# EAGLE board OutputIndicator_v1p3 (EAGLE 9.6.1), part 1 of 2
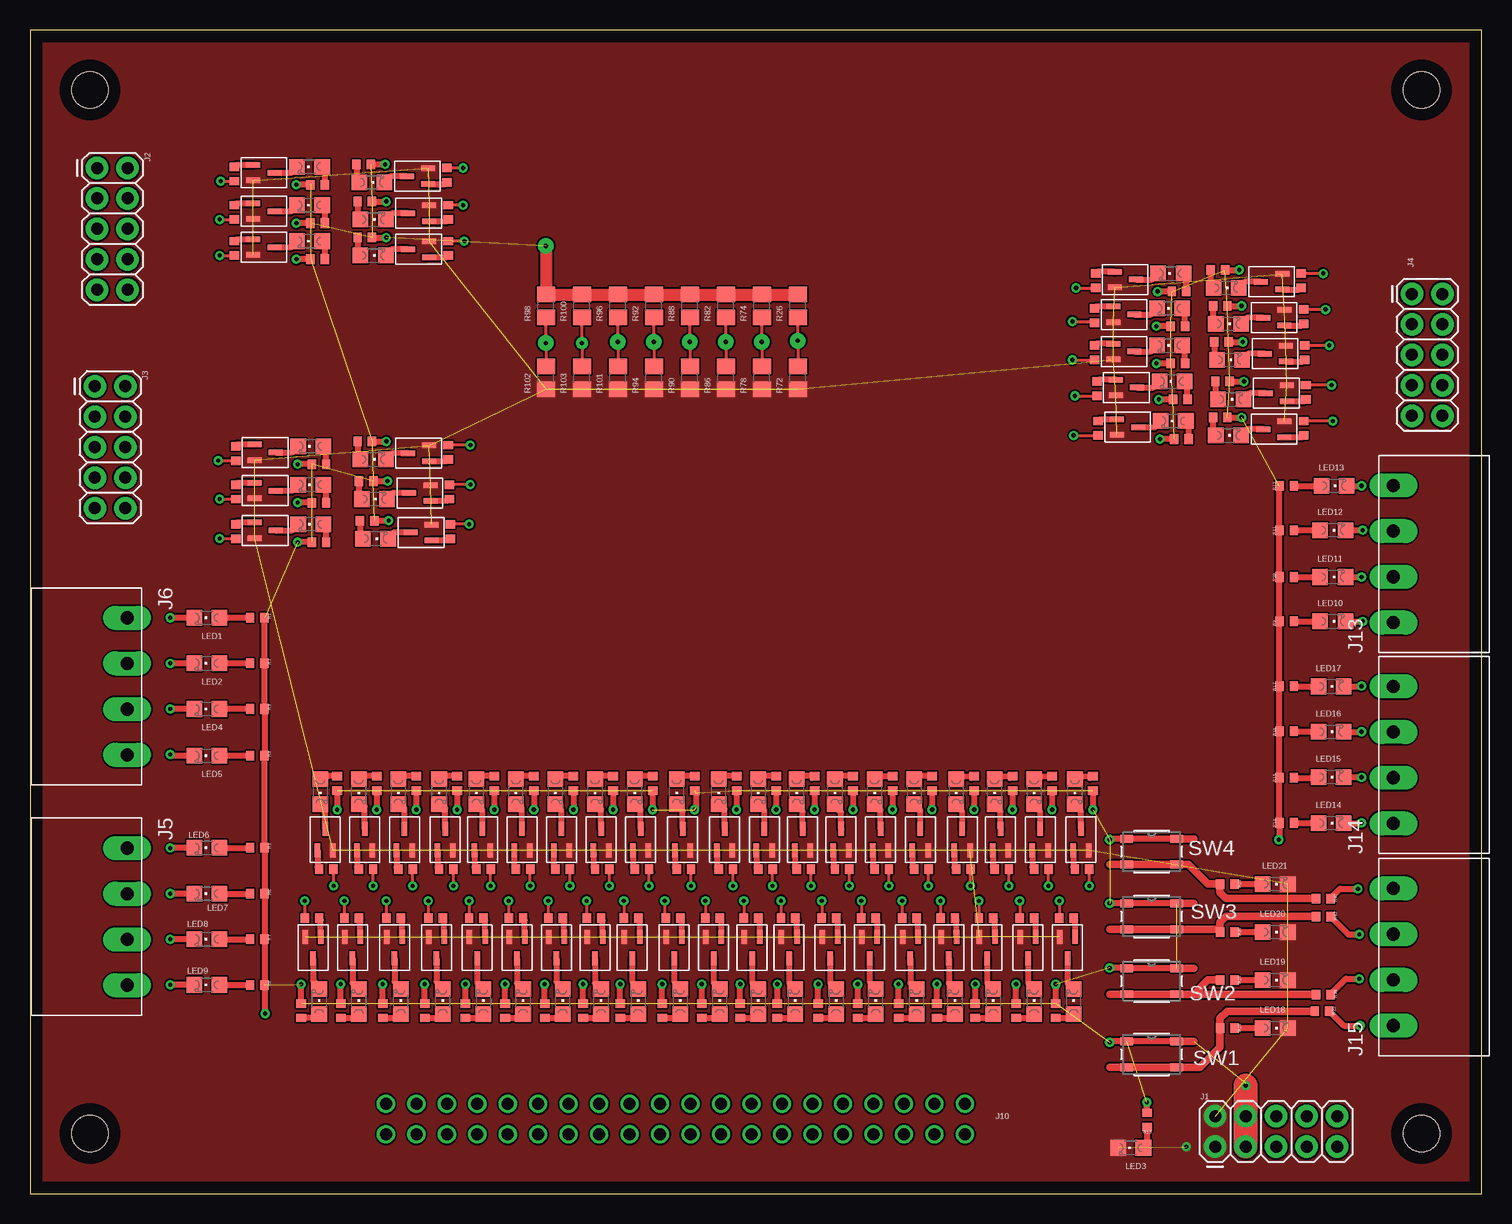
[diagram p0: board, top side]
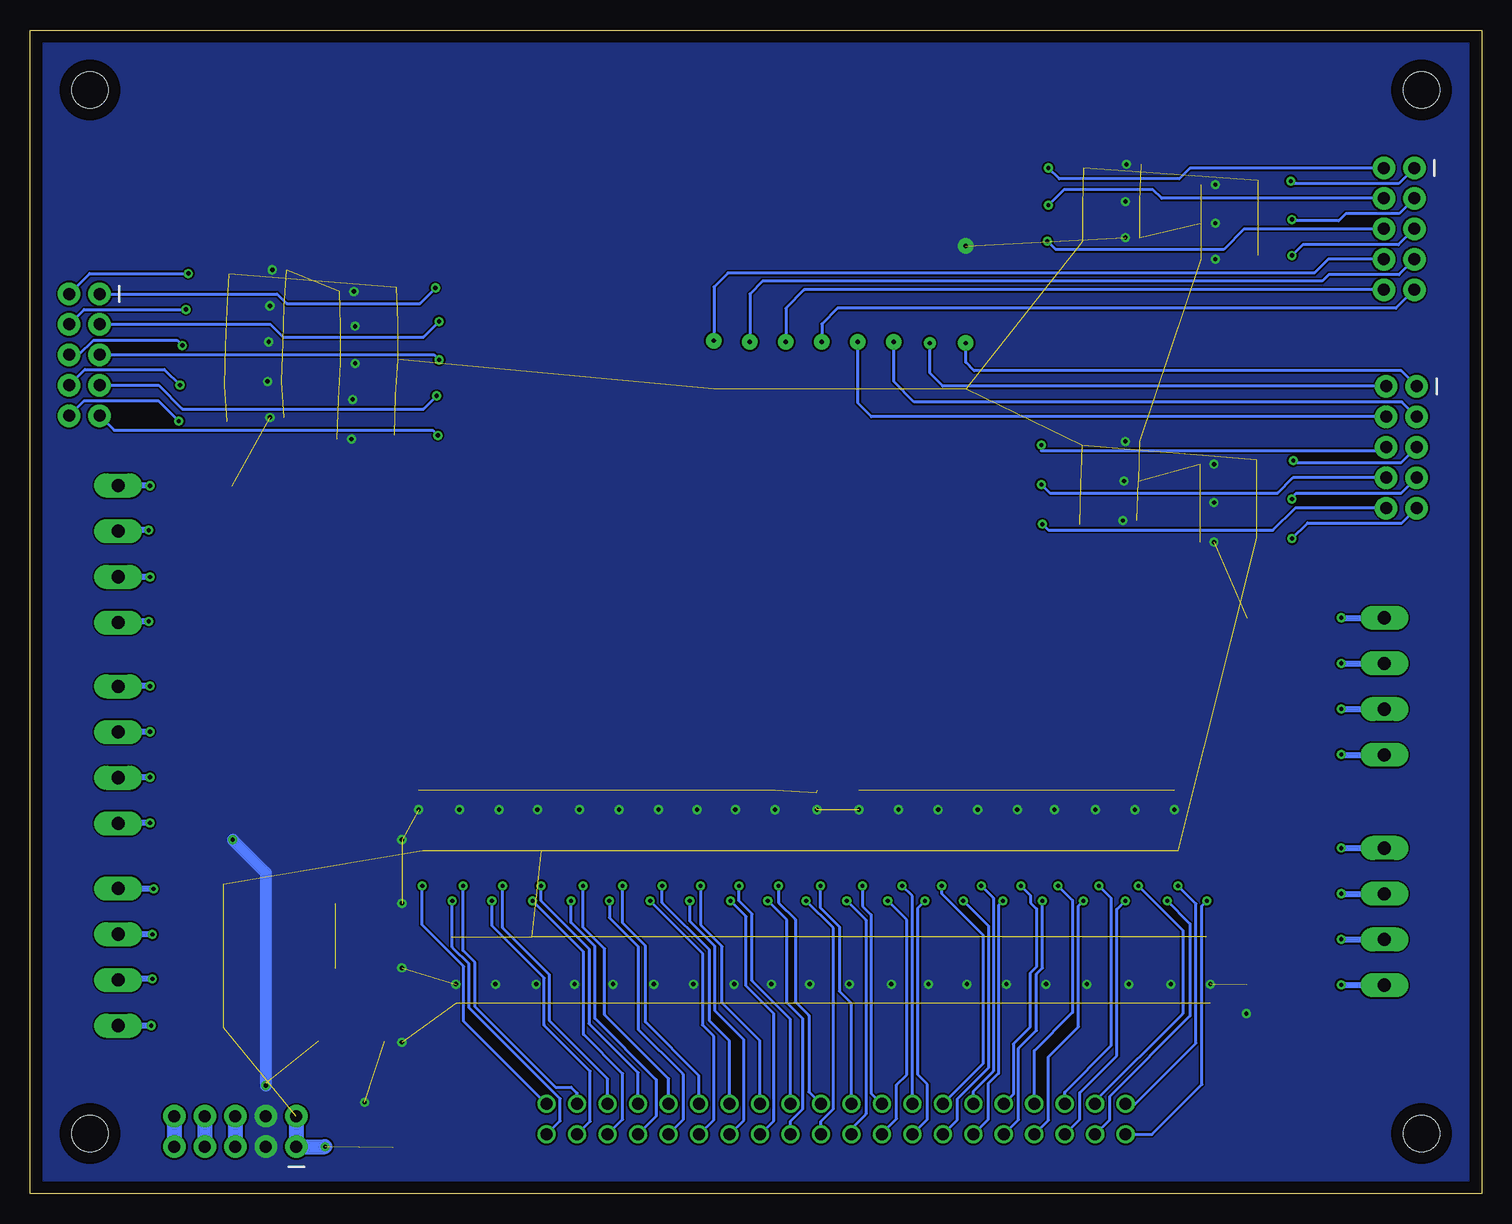
[diagram p1: board, bottom side, seen from below]

Size 121 x 97 mm. Coordinates in mm from the lower left corner, seen from the top.
Outline: 0,0 121,0 121,97 0,97 0,0
Copper layers (1*16): Top 0.035mm / dielectric 1.5mm / Bottom 0.035mm
Design rules "default": minimum track width 6mil, minimum drill 0.35mm, track to track 6mil, track to pad 6mil, pad to pad 6mil, via to via 6mil, smd to smd 6mil, copper to edge 40mil, drill to drill 6mil, minimum pad ring 10mil, minimum via ring 8mil, stop-mask expansion 4mil, vias tented up to drill 0mil, thermal gap 10mil
Holes 3 mm at 5,5 116,5 5,92 116,92

## Footprints (pad centres in the part's own frame; a part is rotated, then mirrored left to right if it is on the bottom)
2X5 = drill 1 pad 1.88: 1 0,0; 2 0,2.54; 3 2.54,0; 4 2.54,2.54; 5 5.08,0; 6 5.08,2.54; 7 7.62,0; 8 7.62,2.54; 9 10.16,0; 10 10.16,2.54
1X4_3.81MM_PITCH = drill 1.1 pad 2 long: P$1 0,0; P$2 3.81,0; P$3 7.62,0; P$4 11.43,0
HEADER_2_X_20_.1_INCH = drill 1: P$1 -24.13,-1.27; P$2 -24.13,1.27; P$3 -21.59,-1.27; P$4 -21.59,1.27; P$5 -19.05,-1.27; P$6 -19.05,1.27; P$7 -16.51,-1.27; P$8 -16.51,1.27; P$9 -13.97,-1.27; P$10 -13.97,1.27; P$11 -11.43,-1.27; P$12 -11.43,1.27; P$13 -8.89,-1.27; P$14 -8.89,1.27; P$15 -6.35,-1.27; P$16 -6.35,1.27; P$17 -3.81,-1.27; P$18 -3.81,1.27; P$19 -1.27,-1.27; P$20 -1.27,1.27; P$21 1.27,-1.27; P$22 1.27,1.27; P$23 3.81,-1.27; P$24 3.81,1.27; P$25 6.35,-1.27; P$26 6.35,1.27; P$27 8.89,-1.27; P$28 8.89,1.27; P$29 11.43,-1.27; P$30 11.43,1.27; P$31 13.97,-1.27; P$32 13.97,1.27; P$33 16.51,-1.27; P$34 16.51,1.27; P$35 19.05,-1.27; P$36 19.05,1.27; P$37 21.59,-1.27; P$38 21.59,1.27; P$39 24.13,-1.27; P$40 24.13,1.27
LED_0805_GREEN = smd 1.3 x 1.3: A 0,-1.05; C 0,1.05
0402 = smd 0.8 x 0.7: P$1 0,0.6; P$2 0,-0.6
0805 = smd 1.3 x 1.5: 1 -0.95,0; 2 0.95,0
PTS810 = smd 1.041 x 0.66: 1 -2.075,1.075; 2 2.075,1.075; 3 -2.075,-1.075; 4 2.075,-1.075
SOT323 = smd 0.457 x 1.168: 1 -0.65,-0.876; 2 0.65,-0.876; 3 0,0.876

## Placement (x,y rotation side)
J1  [2X5]  98.8,3.9 0 top
J2  [2X5]  5.6,85.5 270 top
J3  [2X5]  5.4,67.3 270 top
J4  [2X5]  115.2,75 270 top
J5  [1X4_3.81MM_PITCH]  8.1,28.8 270 top
J6  [1X4_3.81MM_PITCH]  8.1,48 270 top
J10  [HEADER_2_X_20_.1_INCH]  53.8,6.2 0 top
J13  [1X4_3.81MM_PITCH]  113.65,47.6 90 top
J14  [1X4_3.81MM_PITCH]  113.65,30.85 90 top
J15  [1X4_3.81MM_PITCH]  113.65,14 90 top
LED1  LED_0805_GREEN  [LED_0805_GREEN]  14.75,48 90 top
LED2  LED_0805_GREEN  [LED_0805_GREEN]  14.75,44.2 90 top
LED3  LED_0805_GREEN  [LED_0805_GREEN]  91.76,3.81 90 top
LED4  LED_0805_GREEN  [LED_0805_GREEN]  14.75,40.4 90 top
LED5  LED_0805_GREEN  [LED_0805_GREEN]  14.75,36.5 90 top
LED6  LED_0805_GREEN  [LED_0805_GREEN]  14.75,28.82 90 top
LED7  LED_0805_GREEN  [LED_0805_GREEN]  14.75,25 90 top
LED8  LED_0805_GREEN  [LED_0805_GREEN]  14.75,21.2 90 top
LED9  LED_0805_GREEN  [LED_0805_GREEN]  14.75,17.4 90 top
LED10  LED_0805_GREEN  [LED_0805_GREEN]  108.6,47.7 270 top
LED11  LED_0805_GREEN  [LED_0805_GREEN]  108.6,51.4 270 top
LED12  LED_0805_GREEN  [LED_0805_GREEN]  108.6,55.3 270 top
LED13  LED_0805_GREEN  [LED_0805_GREEN]  108.7,59 270 top
LED14  LED_0805_GREEN  [LED_0805_GREEN]  108.45,30.87 270 top
LED15  LED_0805_GREEN  [LED_0805_GREEN]  108.45,34.72 270 top
LED16  LED_0805_GREEN  [LED_0805_GREEN]  108.45,38.49 270 top
LED17  LED_0805_GREEN  [LED_0805_GREEN]  108.45,42.27 270 top
LED18  LED_0805_GREEN  [LED_0805_GREEN]  103.8,13.8 270 top
LED19  LED_0805_GREEN  [LED_0805_GREEN]  103.8,17.8 270 top
LED20  LED_0805_GREEN  [LED_0805_GREEN]  103.8,21.8 270 top
LED21  LED_0805_GREEN  [LED_0805_GREEN]  103.8,25.8 270 top
LED23  LED_0805_GREEN  [LED_0805_GREEN]  24.2,33.5 180 top
LED24  LED_0805_GREEN  [LED_0805_GREEN]  27.4,33.5 180 top
LED25  LED_0805_GREEN  [LED_0805_GREEN]  30.7,33.5 180 top
LED26  LED_0805_GREEN  [LED_0805_GREEN]  99.9,63.2 270 top
LED27  LED_0805_GREEN  [LED_0805_GREEN]  34.1,33.5 180 top
LED28  LED_0805_GREEN  [LED_0805_GREEN]  100.1,66.2 270 top
LED29  LED_0805_GREEN  [LED_0805_GREEN]  37.2,33.5 180 top
LED30  LED_0805_GREEN  [LED_0805_GREEN]  95.2,67.7 90 top
LED31  LED_0805_GREEN  [LED_0805_GREEN]  40.5,33.5 180 top
LED32  LED_0805_GREEN  [LED_0805_GREEN]  23.4,62.3 90 top
LED33  LED_0805_GREEN  [LED_0805_GREEN]  43.8,33.5 180 top
LED34  LED_0805_GREEN  [LED_0805_GREEN]  95.3,64.4 90 top
LED35  LED_0805_GREEN  [LED_0805_GREEN]  47.1,33.5 180 top
LED36  LED_0805_GREEN  [LED_0805_GREEN]  23.4,55.8 90 top
LED37  LED_0805_GREEN  [LED_0805_GREEN]  50.4,33.5 180 top
LED38  LED_0805_GREEN  [LED_0805_GREEN]  100,69.5 270 top
LED39  LED_0805_GREEN  [LED_0805_GREEN]  53.9,33.5 180 top
LED40  LED_0805_GREEN  [LED_0805_GREEN]  23.4,59.1 90 top
LED41  LED_0805_GREEN  [LED_0805_GREEN]  57.4,33.5 180 top
LED42  LED_0805_GREEN  [LED_0805_GREEN]  95,70.7 90 top
LED43  LED_0805_GREEN  [LED_0805_GREEN]  60.7,33.5 180 top
LED44  LED_0805_GREEN  [LED_0805_GREEN]  28.6,61.2 270 top
LED45  LED_0805_GREEN  [LED_0805_GREEN]  63.9,33.5 180 top
LED46  LED_0805_GREEN  [LED_0805_GREEN]  99.9,72.5 270 top
LED47  LED_0805_GREEN  [LED_0805_GREEN]  67.1,33.5 180 top
LED48  LED_0805_GREEN  [LED_0805_GREEN]  28.7,57.9 270 top
LED49  LED_0805_GREEN  [LED_0805_GREEN]  70.4,33.5 180 top
LED50  LED_0805_GREEN  [LED_0805_GREEN]  95,73.8 90 top
LED51  LED_0805_GREEN  [LED_0805_GREEN]  73.7,33.5 180 top
LED52  LED_0805_GREEN  [LED_0805_GREEN]  28.8,54.6 270 top
LED53  LED_0805_GREEN  [LED_0805_GREEN]  77.2,33.5 180 top
LED54  LED_0805_GREEN  [LED_0805_GREEN]  99.7,75.5 270 top
LED55  LED_0805_GREEN  [LED_0805_GREEN]  80.4,33.5 180 top
LED56  LED_0805_GREEN  [LED_0805_GREEN]  23.3,85.6 90 top
LED57  LED_0805_GREEN  [LED_0805_GREEN]  83.7,33.5 180 top
LED58  LED_0805_GREEN  [LED_0805_GREEN]  95.1,76.7 90 top
LED59  LED_0805_GREEN  [LED_0805_GREEN]  87.1,33.5 180 top
LED60  LED_0805_GREEN  [LED_0805_GREEN]  23.3,82.4 90 top
LED61  LED_0805_GREEN  [LED_0805_GREEN]  24.1,16 0 top
LED63  LED_0805_GREEN  [LED_0805_GREEN]  27.4,16 0 top
LED64  LED_0805_GREEN  [LED_0805_GREEN]  23.3,79.4 90 top
LED65  LED_0805_GREEN  [LED_0805_GREEN]  30.9,16 0 top
LED67  LED_0805_GREEN  [LED_0805_GREEN]  34.4,16 0 top
LED69  LED_0805_GREEN  [LED_0805_GREEN]  37.8,16 0 top
LED71  LED_0805_GREEN  [LED_0805_GREEN]  41.1,16 0 top
LED73  LED_0805_GREEN  [LED_0805_GREEN]  44.4,16 0 top
LED75  LED_0805_GREEN  [LED_0805_GREEN]  47.6,16 0 top
LED76  LED_0805_GREEN  [LED_0805_GREEN]  28.5,84.3 270 top
LED77  LED_0805_GREEN  [LED_0805_GREEN]  50.7,16 0 top
LED79  LED_0805_GREEN  [LED_0805_GREEN]  54.2,16 0 top
LED80  LED_0805_GREEN  [LED_0805_GREEN]  28.6,81.2 270 top
LED81  LED_0805_GREEN  [LED_0805_GREEN]  57.5,16 0 top
LED83  LED_0805_GREEN  [LED_0805_GREEN]  60.7,16 0 top
LED84  LED_0805_GREEN  [LED_0805_GREEN]  28.6,78.2 270 top
LED85  LED_0805_GREEN  [LED_0805_GREEN]  63.8,16 0 top
LED87  LED_0805_GREEN  [LED_0805_GREEN]  67.2,16 0 top
LED89  LED_0805_GREEN  [LED_0805_GREEN]  70.5,16 0 top
LED91  LED_0805_GREEN  [LED_0805_GREEN]  73.9,16 0 top
LED93  LED_0805_GREEN  [LED_0805_GREEN]  77.1,16 0 top
LED95  LED_0805_GREEN  [LED_0805_GREEN]  80.3,16 0 top
LED97  LED_0805_GREEN  [LED_0805_GREEN]  83.7,16 0 top
LED99  LED_0805_GREEN  [LED_0805_GREEN]  87,16 0 top
R1  470R  [0402]  18.95,48 270 top
R2  470R  [0402]  18.95,44.2 270 top
R3  470R  [0402]  18.95,40.4 270 top
R4  470R  [0402]  18.95,36.5 270 top
R5  470R  [0402]  18.95,28.83 270 top
R6  470R  [0402]  18.95,25 270 top
R7  470R  [0402]  18.95,21.2 270 top
R8  470R  [0402]  18.95,17.38 270 top
R9  470R  [0402]  104.75,47.7 90 top
R10  470R  [0402]  104.75,51.4 90 top
R11  470R  [0402]  104.75,55.3 90 top
R12  470R  [0402]  104.75,59 90 top
R13  470R  [0402]  93.12,6.13 180 top
R14  470R  [0402]  104.75,30.9 90 top
R15  470R  [0402]  104.75,34.66 90 top
R16  470R  [0402]  104.75,38.53 90 top
R17  470R  [0402]  104.75,42.28 90 top
R18  470R  [0402]  99.8,13.8 270 top
R19  470R  [0402]  99.8,17.8 270 top
R20  470R  [0402]  99.8,21.8 270 top
R21  470R  [0402]  99.8,25.8 270 top
R22  470  [0402]  107.7,15.2 270 top
R23  470R  [0402]  25.6,34.2 0 top
R24  470R  [0402]  28.9,34.2 0 top
R25  470R  [0402]  32.2,34.2 0 top
R26  10k  [0805]  64,74 90 top
R27  470R  [0402]  35.6,34.2 0 top
R28  470R  [0402]  99.21,64.7 90 top
R29  470R  [0402]  38.7,34.2 0 top
R30  470R  [0402]  99.41,67.7 90 top
R31  470R  [0402]  42,34.2 0 top
R32  470R  [0402]  24.09,60.8 270 top
R33  470R  [0402]  45.3,34.2 0 top
R34  470  [0402]  107.8,16.6 270 top
R35  470R  [0402]  48.6,34.2 0 top
R36  470R  [0402]  24.09,54.3 270 top
R37  470R  [0402]  51.9,34.2 0 top
R38  470R  [0402]  95.89,66.2 270 top
R39  470R  [0402]  55.4,34.2 0 top
R40  470R  [0402]  24.09,57.6 270 top
R41  470R  [0402]  58.9,34.2 0 top
R42  470  [0402]  107.8,23.1 270 top
R43  470R  [0402]  62.2,34.2 0 top
R44  470R  [0402]  27.91,62.7 90 top
R45  470R  [0402]  65.4,34.2 0 top
R46  470  [0402]  107.8,24.6 270 top
R47  470R  [0402]  68.6,34.2 0 top
R48  470R  [0402]  28.01,59.4 90 top
R49  470R  [0402]  71.9,34.19 0 top
R50  470R  [0402]  95.99,62.9 270 top
R51  470R  [0402]  75.2,34.2 0 top
R52  470R  [0402]  28.11,56.1 90 top
R53  470R  [0402]  78.7,34.2 0 top
R54  470R  [0402]  99.31,71 90 top
R55  470R  [0402]  81.9,34.2 0 top
R56  470R  [0402]  23.99,84.1 270 top
R57  470R  [0402]  85.2,34.2 0 top
R58  470R  [0402]  95.69,69.2 270 top
R59  470R  [0402]  88.6,34.2 0 top
R60  470R  [0402]  23.99,80.9 270 top
R61  470R  [0402]  22.6,15.25 180 top
R62  470R  [0402]  99.21,74 90 top
R63  470R  [0402]  25.9,15.25 180 top
R64  470R  [0402]  23.99,77.9 270 top
R65  470R  [0402]  29.4,15.25 180 top
R66  470R  [0402]  95.69,72.3 270 top
R67  470R  [0402]  32.9,15.25 180 top
R68  470R  [0402]  99.01,77 90 top
R69  470R  [0402]  36.3,15.25 180 top
R70  470R  [0402]  95.79,75.2 270 top
R71  470R  [0402]  39.6,15.25 180 top
R72  4.99k  [0805]  64,68 90 top
R73  470R  [0402]  42.9,15.25 180 top
R74  10k  [0805]  61,74 90 top
R75  470R  [0402]  46.1,15.25 180 top
R76  470R  [0402]  27.81,85.8 90 top
R77  470R  [0402]  49.2,15.25 180 top
R78  4.99k  [0805]  61,68 90 top
R79  470R  [0402]  52.7,15.25 180 top
R80  470R  [0402]  27.91,82.7 90 top
R81  470R  [0402]  56,15.25 180 top
R82  10k  [0805]  58,74 90 top
R83  470R  [0402]  59.2,15.25 180 top
R84  470R  [0402]  27.91,79.7 90 top
R85  470R  [0402]  62.3,15.25 180 top
R86  4.99k  [0805]  58,68 90 top
R87  470R  [0402]  65.7,15.25 180 top
R88  10k  [0805]  55,74 90 top
R89  470R  [0402]  69,15.25 180 top
R90  4.99k  [0805]  55,68 90 top
R91  470R  [0402]  72.4,15.25 180 top
R92  10k  [0805]  52,74 90 top
R93  470R  [0402]  75.6,15.25 180 top
R94  4.99k  [0805]  52,68 90 top
R95  470R  [0402]  78.8,15.25 180 top
R96  10k  [0805]  49,74 90 top
R97  470R  [0402]  82.2,15.25 180 top
R98  10k  [0805]  43,74 90 top
R99  470R  [0402]  85.5,15.25 180 top
R100  10k  [0805]  46,74 90 top
R101  4.99k  [0805]  49,68 90 top
R102  4.99k  [0805]  43,68 90 top
R103  4.99k  [0805]  46,68 90 top
RYS1  1K  [0402]  24.7,27.05 270 top
RYS2  1K  [0402]  28,27.05 270 top
RYS3  1K  [0402]  31.3,27.05 270 top
RYS4  1K  [0402]  106.15,63.8 0 top
RYS5  1K  [0402]  34.7,27.05 270 top
RYS6  1K  [0402]  106.35,66.8 0 top
RYS7  1K  [0402]  37.8,27.05 270 top
RYS9  1K  [0402]  88.95,67.1 180 top
RYS10  1K  [0402]  41.1,27.05 270 top
RYS11  1K  [0402]  17.15,61.7 180 top
RYS12  1K  [0402]  44.4,27.05 270 top
RYS13  1K  [0402]  89.05,63.8 180 top
RYS14  1K  [0402]  47.7,27.05 270 top
RYS15  1K  [0402]  17.15,55.2 180 top
RYS16  1K  [0402]  51,27.05 270 top
RYS17  1K  [0402]  106.25,70.1 0 top
RYS18  1K  [0402]  54.5,27.05 270 top
RYS19  1K  [0402]  17.15,58.5 180 top
RYS20  1K  [0402]  58,27.05 270 top
RYS21  1K  [0402]  88.75,70.1 180 top
RYS22  1K  [0402]  61.3,27.05 270 top
RYS23  1K  [0402]  34.85,61.8 0 top
RYS24  1K  [0402]  64.5,27.05 270 top
RYS25  1K  [0402]  106.15,73.1 0 top
RYS26  1K  [0402]  67.7,27.05 270 top
RYS27  1K  [0402]  34.95,58.5 0 top
RYS28  1K  [0402]  71,27.05 270 top
RYS29  1K  [0402]  88.75,73.2 180 top
RYS30  1K  [0402]  74.3,27.05 270 top
RYS31  1K  [0402]  35.05,55.2 0 top
RYS32  1K  [0402]  77.8,27.05 270 top
RYS33  1K  [0402]  105.95,76.1 0 top
RYS34  1K  [0402]  81,27.05 270 top
RYS35  1K  [0402]  17.05,85 180 top
RYS36  1K  [0402]  84.3,27.05 270 top
RYS37  1K  [0402]  88.85,76.1 180 top
RYS38  1K  [0402]  87.7,27.05 270 top
RYS39  1K  [0402]  17.05,81.8 180 top
RYS40  1K  [0402]  23.5,22.95 90 top
RYS42  1K  [0402]  26.8,22.95 90 top
RYS43  1K  [0402]  17.05,78.8 180 top
RYS44  1K  [0402]  30.3,22.95 90 top
RYS46  1K  [0402]  33.8,22.95 90 top
RYS48  1K  [0402]  37.2,22.95 90 top
RYS50  1K  [0402]  40.5,22.95 90 top
RYS52  1K  [0402]  43.8,22.95 90 top
RYS54  1K  [0402]  47,22.95 90 top
RYS55  1K  [0402]  34.75,84.9 0 top
RYS56  1K  [0402]  50.1,22.95 90 top
RYS58  1K  [0402]  53.6,22.95 90 top
RYS59  1K  [0402]  34.85,81.8 0 top
RYS60  1K  [0402]  56.9,22.95 90 top
RYS62  1K  [0402]  60.1,22.95 90 top
RYS63  1K  [0402]  34.85,78.8 0 top
RYS64  1K  [0402]  63.2,22.95 90 top
RYS66  1K  [0402]  66.6,22.95 90 top
RYS68  1K  [0402]  69.9,22.95 90 top
RYS70  1K  [0402]  73.3,22.95 90 top
RYS72  1K  [0402]  76.5,22.95 90 top
RYS74  1K  [0402]  79.7,22.95 90 top
RYS76  1K  [0402]  83.1,22.95 90 top
RYS78  1K  [0402]  86.4,22.95 90 top
SW1  PTS810SJG250SMTRLFS  [PTS810]  93.5,11.6 0 top
SW2  PTS810SJG250SMTRLFS  [PTS810]  93.5,17.7 0 top
SW3  PTS810SJG250SMTRLFS  [PTS810]  93.5,23.1 0 top
SW4  PTS810SJG250SMTRLFS  [PTS810]  93.5,28.5 0 top
U1  [SOT323]  24.61,29.5 0 top
U2  [SOT323]  27.91,29.5 0 top
U3  [SOT323]  31.21,29.5 0 top
U4  [SOT323]  103.7,63.71 90 top
U5  [SOT323]  34.61,29.5 0 top
U6  [SOT323]  103.9,66.71 90 top
U7  [SOT323]  37.71,29.5 0 top
U8  [SOT323]  91.4,67.19 270 top
U9  [SOT323]  41.01,29.5 0 top
U10  [SOT323]  19.6,61.79 270 top
U11  [SOT323]  44.31,29.5 0 top
U12  [SOT323]  91.5,63.89 270 top
U13  [SOT323]  47.61,29.5 0 top
U14  [SOT323]  19.6,55.29 270 top
U15  [SOT323]  50.91,29.5 0 top
U16  [SOT323]  103.8,70.01 90 top
U17  [SOT323]  54.41,29.5 0 top
U18  [SOT323]  19.6,58.59 270 top
U20  [SOT323]  57.91,29.5 0 top
U21  [SOT323]  91.2,70.19 270 top
U22  [SOT323]  61.21,29.5 0 top
U23  [SOT323]  32.4,61.71 90 top
U24  [SOT323]  64.41,29.5 0 top
U25  [SOT323]  103.7,73.01 90 top
U26  [SOT323]  67.61,29.5 0 top
U27  [SOT323]  32.5,58.41 90 top
U28  [SOT323]  70.91,29.5 0 top
U29  [SOT323]  91.2,73.29 270 top
U30  [SOT323]  74.21,29.5 0 top
U31  [SOT323]  32.6,55.11 90 top
U32  [SOT323]  77.71,29.5 0 top
U33  [SOT323]  103.5,76.01 90 top
U34  [SOT323]  80.91,29.5 0 top
U35  [SOT323]  19.5,85.09 270 top
U36  [SOT323]  84.21,29.5 0 top
U37  [SOT323]  91.3,76.19 270 top
U38  [SOT323]  87.61,29.5 0 top
U39  [SOT323]  19.5,81.89 270 top
U40  [SOT323]  23.59,20.5 180 top
U42  [SOT323]  26.89,20.5 180 top
U43  [SOT323]  19.5,78.89 270 top
U44  [SOT323]  30.39,20.5 180 top
U46  [SOT323]  33.89,20.5 180 top
U48  [SOT323]  37.29,20.5 180 top
U50  [SOT323]  40.59,20.5 180 top
U52  [SOT323]  43.89,20.5 180 top
U54  [SOT323]  47.09,20.5 180 top
U55  [SOT323]  32.3,84.81 90 top
U56  [SOT323]  50.19,20.5 180 top
U58  [SOT323]  53.69,20.5 180 top
U59  [SOT323]  32.4,81.71 90 top
U60  [SOT323]  56.99,20.5 180 top
U62  [SOT323]  60.19,20.5 180 top
U63  [SOT323]  32.4,78.71 90 top
U64  [SOT323]  63.29,20.5 180 top
U66  [SOT323]  66.69,20.5 180 top
U68  [SOT323]  69.99,20.5 180 top
U70  [SOT323]  73.39,20.5 180 top
U72  [SOT323]  76.59,20.5 180 top
U74  [SOT323]  79.79,20.5 180 top
U76  [SOT323]  83.19,20.5 180 top
U78  [SOT323]  86.49,20.5 180 top

## Library data of the parts
J1-J4 = 3D_MIG_Controller; PROD_ID: CONN-08499; SF_ID: PRT-0778
J5 J6 J10 J13-J15 LED1-LED21 LED23-LED61 LED63-LED65 LED67 LED69 LED71 LED73 LED75-LED77 LED79-LED81 LED83-LED85 LED87 LED89 LED91 LED93 LED95 LED97 LED99 R1-R103 RYS1-RYS7 RYS9-RYS40 RYS42-RYS44 RYS46 RYS48 RYS50 RYS52 RYS54-RYS56 RYS58-RYS60 RYS62-RYS64 RYS66 RYS68 RYS70 RYS72 RYS74 RYS76 RYS78 = 3D_MIG_Controller
SW1-SW4 = 3D_MIG_Controller; BUILT_BY: EMA_Cory; COPYRIGHT: Copyright (C) 2018 Accelerated Designs. All rights reserved; DATASHEET: https://www.ckswitches.com/products/tactile/PTS810/#PTS810SJG250SMTRLFS; MANUFACTURER_PART_NUMBER: PTS810SJG250SMTRLFS; VENDOR: C&K
U1-U18 U20-U40 U42-U44 U46 U48 U50 U52 U54-U56 U58-U60 U62-U64 U66 U68 U70 U72 U74 U76 U78 = 3D_MIG_Controller; MANUFACTURER_PART_NUMBER: BC846BW; VENDOR: Nexperia

## Nets
GND: J1.1 J1.2 LED3.C LED18.C LED19.C LED20.C LED21.C R72.1 R78.1 R86.1 R90.1 R94.1 R101.1 R102.1 R103.1 U1.2 U2.2 U3.2 U4.2 U5.2 U6.2 U7.2 U8.2 U9.2 U10.2 U11.2 U12.2 U13.2 U14.2 U15.2 U16.2 U17.2 U18.2 U20.2 U21.2 U22.2 U23.2 U24.2 U25.2 U26.2 U27.2 U28.2 U29.2 U30.2 U31.2 U32.2 U33.2 U34.2 U35.2 U36.2 U37.2 U38.2 U39.2 U40.2 U42.2 U43.2 U44.2 U46.2 U48.2 U50.2 U52.2 U54.2 U55.2 U56.2 U58.2 U59.2 U60.2 U62.2 U63.2 U64.2 U66.2 U68.2 U70.2 U72.2 U74.2 U76.2 U78.2
GNDE: J1.9 J1.10
IIC_1_SCL: J10.P$5 RYS44.P$1
IIC_1_SDA: J10.P$6 RYS3.P$1
INT_MI_01: J10.P$39 RYS78.P$1
INT_MI_02: J10.P$40 RYS38.P$1
INT_MI_03: J10.P$9 RYS48.P$1
INT_MI_04: J10.P$10 RYS7.P$1
INT_MI_05: J10.P$1 RYS40.P$1
J2_1: J2.1 RYS35.P$1
J2_2: J2.2 RYS55.P$1
J2_3: J2.3 RYS39.P$1
J2_4: J2.4 RYS59.P$1
J2_5: J2.5 RYS43.P$1
J2_6: J2.6 RYS63.P$1
J2_7: J2.7 R74.1 R78.2
J2_8: J2.8 R26.1 R72.2
J2_9: J2.9 R88.1 R90.2
J2_10: J2.10 R82.1 R86.2
J3_1: J3.1 R98.1 R102.2
J3_2: J3.2 R100.1 R103.2
J3_3: J3.3 R96.1 R101.2
J3_4: J3.4 R92.1 R94.2
J3_5: J3.5 RYS11.P$1
J3_6: J3.6 RYS23.P$1
J3_7: J3.7 RYS19.P$1
J3_8: J3.8 RYS27.P$1
J3_9: J3.9 RYS15.P$1
J3_10: J3.10 RYS31.P$1
J4_1: J4.1 RYS37.P$1
J4_2: J4.2 RYS33.P$1
J4_3: J4.3 RYS29.P$1
J4_4: J4.4 RYS25.P$1
J4_5: J4.5 RYS21.P$1
J4_6: J4.6 RYS17.P$1
J4_7: J4.7 RYS9.P$1
J4_8: J4.8 RYS6.P$1
J4_9: J4.9 RYS13.P$1
J4_10: J4.10 RYS4.P$1
N$1: J5.P$1 LED6.C
N$2: J5.P$2 LED7.C
N$3: LED3.A R13.P$1
N$4: J5.P$3 LED8.C
N$5: J5.P$4 LED9.C
N$6: LED9.A R8.P$2
N$7: LED8.A R7.P$2
N$8: LED7.A R6.P$2
N$9: LED6.A R5.P$2
N$10: J6.P$1 LED1.C
N$11: J6.P$2 LED2.C
N$12: J6.P$3 LED4.C
N$13: J6.P$4 LED5.C
N$14: LED5.A R4.P$2
N$15: LED2.A R2.P$2
N$16: LED1.A R1.P$2
N$17: LED4.A R3.P$2
N$18: J13.P$1 LED10.C
N$19: J13.P$2 LED11.C
N$20: J13.P$3 LED12.C
N$21: J13.P$4 LED13.C
N$22: LED13.A R12.P$2
N$23: LED11.A R10.P$2
N$24: LED10.A R9.P$2
N$25: LED12.A R11.P$2
N$26: J14.P$1 LED14.C
N$27: J14.P$2 LED15.C
N$28: J14.P$3 LED16.C
N$29: J14.P$4 LED17.C
N$30: LED17.A R17.P$2
N$31: LED15.A R15.P$2
N$32: LED14.A R14.P$2
N$33: LED16.A R16.P$2
N$34: J15.P$1 R22.P$1
N$35: J15.P$2 R34.P$1
N$36: J15.P$3 R42.P$1
N$37: J15.P$4 R46.P$1
N$38: LED18.A R18.P$1
N$39: LED19.A R19.P$1
N$40: LED20.A R20.P$1
N$41: LED21.A R21.P$1
N$45: RYS1.P$2 U1.1
N$46: LED23.A R23.P$1
N$47: LED23.C U1.3
N$48: RYS2.P$2 U2.1
N$49: LED24.A R24.P$1
N$50: LED24.C U2.3
N$51: RYS3.P$2 U3.1
N$52: LED25.A R25.P$1
N$53: LED25.C U3.3
N$57: RYS5.P$2 U5.1
N$58: LED27.A R27.P$1
N$59: LED27.C U5.3
N$60: RYS4.P$2 U4.1
N$61: LED26.A R28.P$1
N$62: LED26.C U4.3
N$63: RYS7.P$2 U7.1
N$64: LED29.A R29.P$1
N$65: LED29.C U7.3
N$66: RYS6.P$2 U6.1
N$67: LED28.A R30.P$1
N$68: LED28.C U6.3
N$69: RYS10.P$2 U9.1
N$70: LED31.A R31.P$1
N$71: LED31.C U9.3
N$72: RYS11.P$2 U10.1
N$73: LED32.A R32.P$1
N$74: LED32.C U10.3
N$75: RYS12.P$2 U11.1
N$76: LED33.A R33.P$1
N$77: LED33.C U11.3
N$79: R18.P$2 R22.P$2 SW1.3 SW1.4
N$80: R19.P$2 R34.P$2 SW2.3 SW2.4
N$81: RYS14.P$2 U13.1
N$82: LED35.A R35.P$1
N$83: LED35.C U13.3
N$84: RYS15.P$2 U14.1
N$85: LED36.A R36.P$1
N$86: LED36.C U14.3
N$87: RYS16.P$2 U15.1
N$88: LED37.A R37.P$1
N$89: LED37.C U15.3
N$90: RYS9.P$2 U8.1
N$91: LED30.A R38.P$1
N$92: LED30.C U8.3
N$93: RYS18.P$2 U17.1
N$94: LED39.A R39.P$1
N$95: LED39.C U17.3
N$96: RYS19.P$2 U18.1
N$97: LED40.A R40.P$1
N$98: LED40.C U18.3
N$99: RYS20.P$2 U20.1
N$100: LED41.A R41.P$1
N$101: LED41.C U20.3
N$102: R20.P$2 R42.P$2 SW3.3 SW3.4
N$103: R21.P$2 R46.P$2 SW4.3 SW4.4
N$104: RYS13.P$2 U12.1
N$105: RYS22.P$2 U22.1
N$106: LED43.A R43.P$1
N$107: LED43.C U22.3
N$108: RYS23.P$2 U23.1
N$109: LED44.A R44.P$1
N$110: LED44.C U23.3
N$111: RYS24.P$2 U24.1
N$112: LED45.A R45.P$1
N$113: LED45.C U24.3
N$114: LED34.A R50.P$1
N$115: LED34.C U12.3
N$116: RYS17.P$2 U16.1
N$117: RYS26.P$2 U26.1
N$118: LED47.A R47.P$1
N$119: LED47.C U26.3
N$120: RYS27.P$2 U27.1
N$121: LED48.A R48.P$1
N$122: LED48.C U27.3
N$123: RYS28.P$2 U28.1
N$124: LED49.A R49.P$1
N$125: LED49.C U28.3
N$126: LED38.A R54.P$1
N$127: LED38.C U16.3
N$128: RYS21.P$2 U21.1
N$129: RYS30.P$2 U30.1
N$130: LED51.A R51.P$1
N$131: LED51.C U30.3
N$132: RYS31.P$2 U31.1
N$133: LED52.A R52.P$1
N$134: LED52.C U31.3
N$135: RYS32.P$2 U32.1
N$136: LED53.A R53.P$1
N$137: LED53.C U32.3
N$138: LED42.A R58.P$1
N$139: LED42.C U21.3
N$140: RYS25.P$2 U25.1
N$141: RYS34.P$2 U34.1
N$142: LED55.A R55.P$1
N$143: LED55.C U34.3
N$144: RYS35.P$2 U35.1
N$145: LED56.A R56.P$1
N$146: LED56.C U35.3
N$147: RYS36.P$2 U36.1
N$148: LED57.A R57.P$1
N$149: LED57.C U36.3
N$150: LED46.A R62.P$1
N$151: LED46.C U25.3
N$152: RYS29.P$2 U29.1
N$153: RYS38.P$2 U38.1
N$154: LED59.A R59.P$1
N$155: LED59.C U38.3
N$156: RYS39.P$2 U39.1
N$157: LED60.A R60.P$1
N$158: LED60.C U39.3
N$159: RYS40.P$2 U40.1
N$160: LED61.A R61.P$1
N$161: LED61.C U40.3
N$162: LED50.A R66.P$1
N$163: LED50.C U29.3
N$164: RYS33.P$2 U33.1
N$165: RYS42.P$2 U42.1
N$166: LED63.A R63.P$1
N$167: LED63.C U42.3
N$168: RYS43.P$2 U43.1
N$169: LED64.A R64.P$1
N$170: LED64.C U43.3
N$171: RYS44.P$2 U44.1
N$172: LED65.A R65.P$1
N$173: LED65.C U44.3
N$174: LED54.A R68.P$1
N$175: LED54.C U33.3
N$176: RYS37.P$2 U37.1
N$177: RYS46.P$2 U46.1
N$178: LED67.A R67.P$1
N$179: LED67.C U46.3
N$180: LED58.A R70.P$1
N$181: LED58.C U37.3
N$183: RYS48.P$2 U48.1
N$184: LED69.A R69.P$1
N$185: LED69.C U48.3
N$189: RYS50.P$2 U50.1
N$190: LED71.A R71.P$1
N$191: LED71.C U50.3
N$195: RYS52.P$2 U52.1
N$196: LED73.A R73.P$1
N$197: LED73.C U52.3
N$201: RYS54.P$2 U54.1
N$202: LED75.A R75.P$1
N$203: LED75.C U54.3
N$204: RYS55.P$2 U55.1
N$205: LED76.A R76.P$1
N$206: LED76.C U55.3
N$207: RYS56.P$2 U56.1
N$208: LED77.A R77.P$1
N$209: LED77.C U56.3
N$213: RYS58.P$2 U58.1
N$214: LED79.A R79.P$1
N$215: LED79.C U58.3
N$216: RYS59.P$2 U59.1
N$217: LED80.A R80.P$1
N$218: LED80.C U59.3
N$219: RYS60.P$2 U60.1
N$220: LED81.A R81.P$1
N$221: LED81.C U60.3
N$225: RYS62.P$2 U62.1
N$226: LED83.A R83.P$1
N$227: LED83.C U62.3
N$228: RYS63.P$2 U63.1
N$229: LED84.A R84.P$1
N$230: LED84.C U63.3
N$231: RYS64.P$2 U64.1
N$232: LED85.A R85.P$1
N$233: LED85.C U64.3
N$237: RYS66.P$2 U66.1
N$238: LED87.A R87.P$1
N$239: LED87.C U66.3
N$243: RYS68.P$2 U68.1
N$244: LED89.A R89.P$1
N$245: LED89.C U68.3
N$249: RYS70.P$2 U70.1
N$250: LED91.A R91.P$1
N$251: LED91.C U70.3
N$255: RYS72.P$2 U72.1
N$256: LED93.A R93.P$1
N$257: LED93.C U72.3
N$261: RYS74.P$2 U74.1
N$262: LED95.A R95.P$1
N$263: LED95.C U74.3
N$267: RYS76.P$2 U76.1
N$268: LED97.A R97.P$1
N$269: LED97.C U76.3
N$273: RYS78.P$2 U78.1
N$274: LED99.A R99.P$1
N$275: LED99.C U78.3
P1_02: J10.P$7 RYS46.P$1
P1_03: J10.P$8 RYS5.P$1
P1_06: J10.P$11 RYS50.P$1
P1_07: J10.P$12 RYS10.P$1
P1_11: J10.P$38 RYS36.P$1
P1_12: J10.P$37 RYS76.P$1
P1_13: J10.P$36 RYS34.P$1
P1_14: J10.P$35 RYS74.P$1
P1_15: J10.P$34 RYS32.P$1
P6_00: J10.P$13 RYS52.P$1
P6_01: J10.P$14 RYS12.P$1
P6_02: J10.P$15 RYS54.P$1
P6_03: J10.P$16 RYS14.P$1
P6_04: J10.P$17 RYS56.P$1
P6_05: J10.P$18 RYS16.P$1
P6_06: J10.P$19 RYS58.P$1
P6_07: J10.P$20 RYS18.P$1
P6_08: J10.P$33 RYS72.P$1
P6_09: J10.P$32 RYS30.P$1
P6_10: J10.P$31 RYS70.P$1
P6_11: J10.P$30 RYS28.P$1
P6_12: J10.P$29 RYS68.P$1
P6_13: J10.P$28 RYS26.P$1
P6_14: J10.P$27 RYS66.P$1
P6_15: J10.P$26 RYS24.P$1
P8_00: J10.P$4 RYS2.P$1
P8_01: J10.P$3 RYS42.P$1
P8_02: J10.P$2 RYS1.P$1
PA_00: J10.P$21 RYS60.P$1
PA_01: J10.P$22 RYS20.P$1
PA_08: J10.P$25 RYS64.P$1
PA_09: J10.P$24 RYS22.P$1
PA_10: J10.P$23 RYS62.P$1
VDD: J1.3 J1.4 R1.P$1 R2.P$1 R3.P$1 R4.P$1 R5.P$1 R6.P$1 R7.P$1 R8.P$1 R9.P$1 R10.P$1 R11.P$1 R12.P$1 R13.P$2 R14.P$1 R15.P$1 R16.P$1 R17.P$1 R23.P$2 R24.P$2 R25.P$2 R26.2 R27.P$2 R28.P$2 R29.P$2 R30.P$2 R31.P$2 R32.P$2 R33.P$2 R35.P$2 R36.P$2 R37.P$2 R38.P$2 R39.P$2 R40.P$2 R41.P$2 R43.P$2 R44.P$2 R45.P$2 R47.P$2 R48.P$2 R49.P$2 R50.P$2 R51.P$2 R52.P$2 R53.P$2 R54.P$2 R55.P$2 R56.P$2 R57.P$2 R58.P$2 R59.P$2 R60.P$2 R61.P$2 R62.P$2 R63.P$2 R64.P$2 R65.P$2 R66.P$2 R67.P$2 R68.P$2 R69.P$2 R70.P$2 R71.P$2 R73.P$2 R74.2 R75.P$2 R76.P$2 R77.P$2 R79.P$2 R80.P$2 R81.P$2 R82.2 R83.P$2 R84.P$2 R85.P$2 R87.P$2 R88.2 R89.P$2 R91.P$2 R92.2 R93.P$2 R95.P$2 R96.2 R97.P$2 R98.2 R99.P$2 R100.2 SW1.1 SW1.2 SW2.1 SW2.2 SW3.1 SW3.2 SW4.1 SW4.2
VDD5: J1.5 J1.6
VDD12: J1.7 J1.8